# Altium PCB team dashboard display.PcbDoc
Units mil, origin at the board's own origin, x right, y up, seen from the top; angles counter-clockwise.
Board outline 3349.21 x 3087.01 mil, 2 copper layers (Top, Bottom); 36 components, 40 nets, 146 pads, 0 vias.
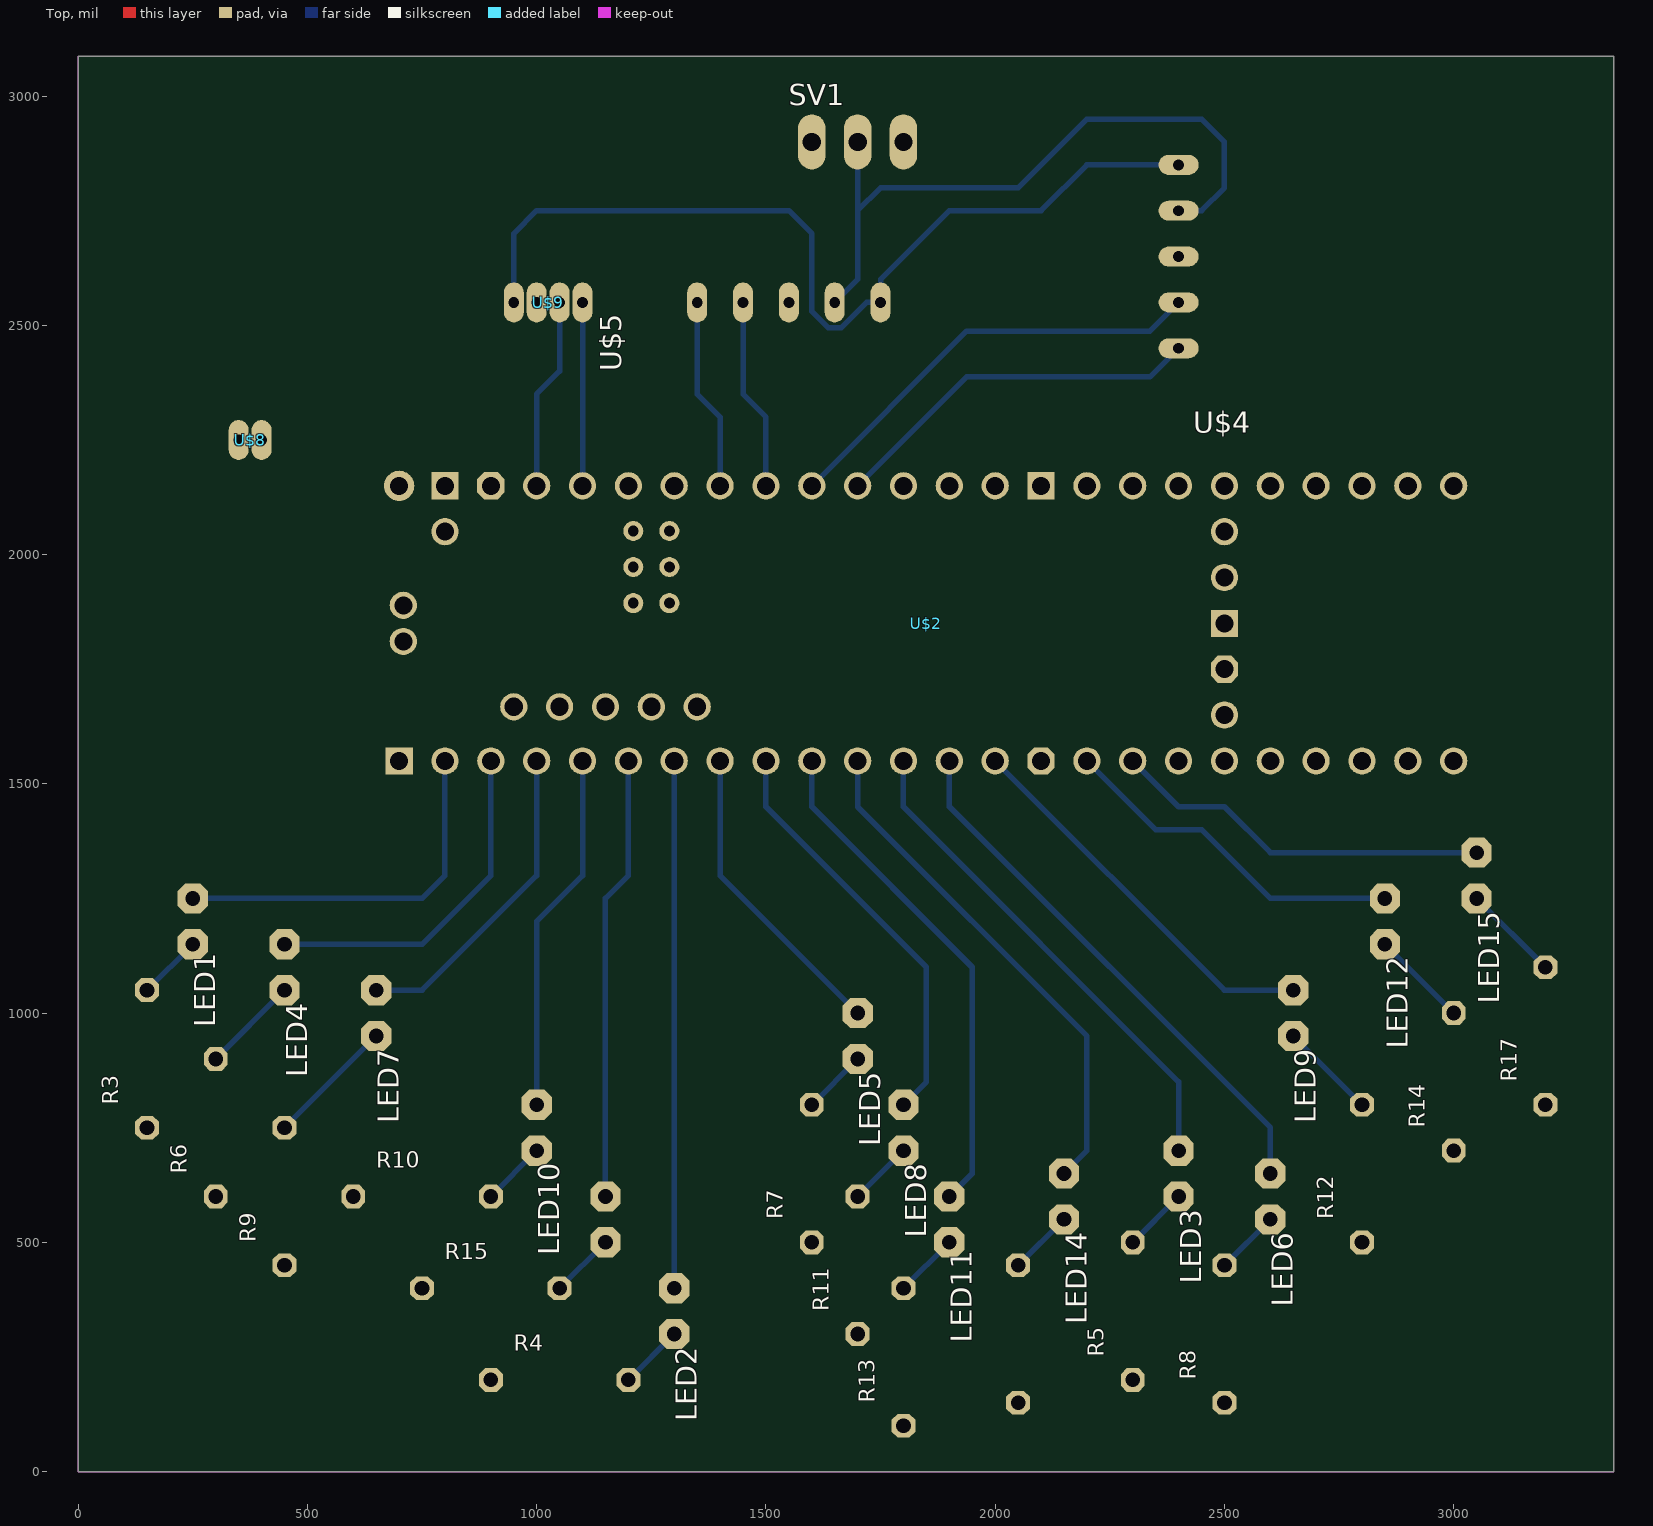
[diagram p0: Top view]
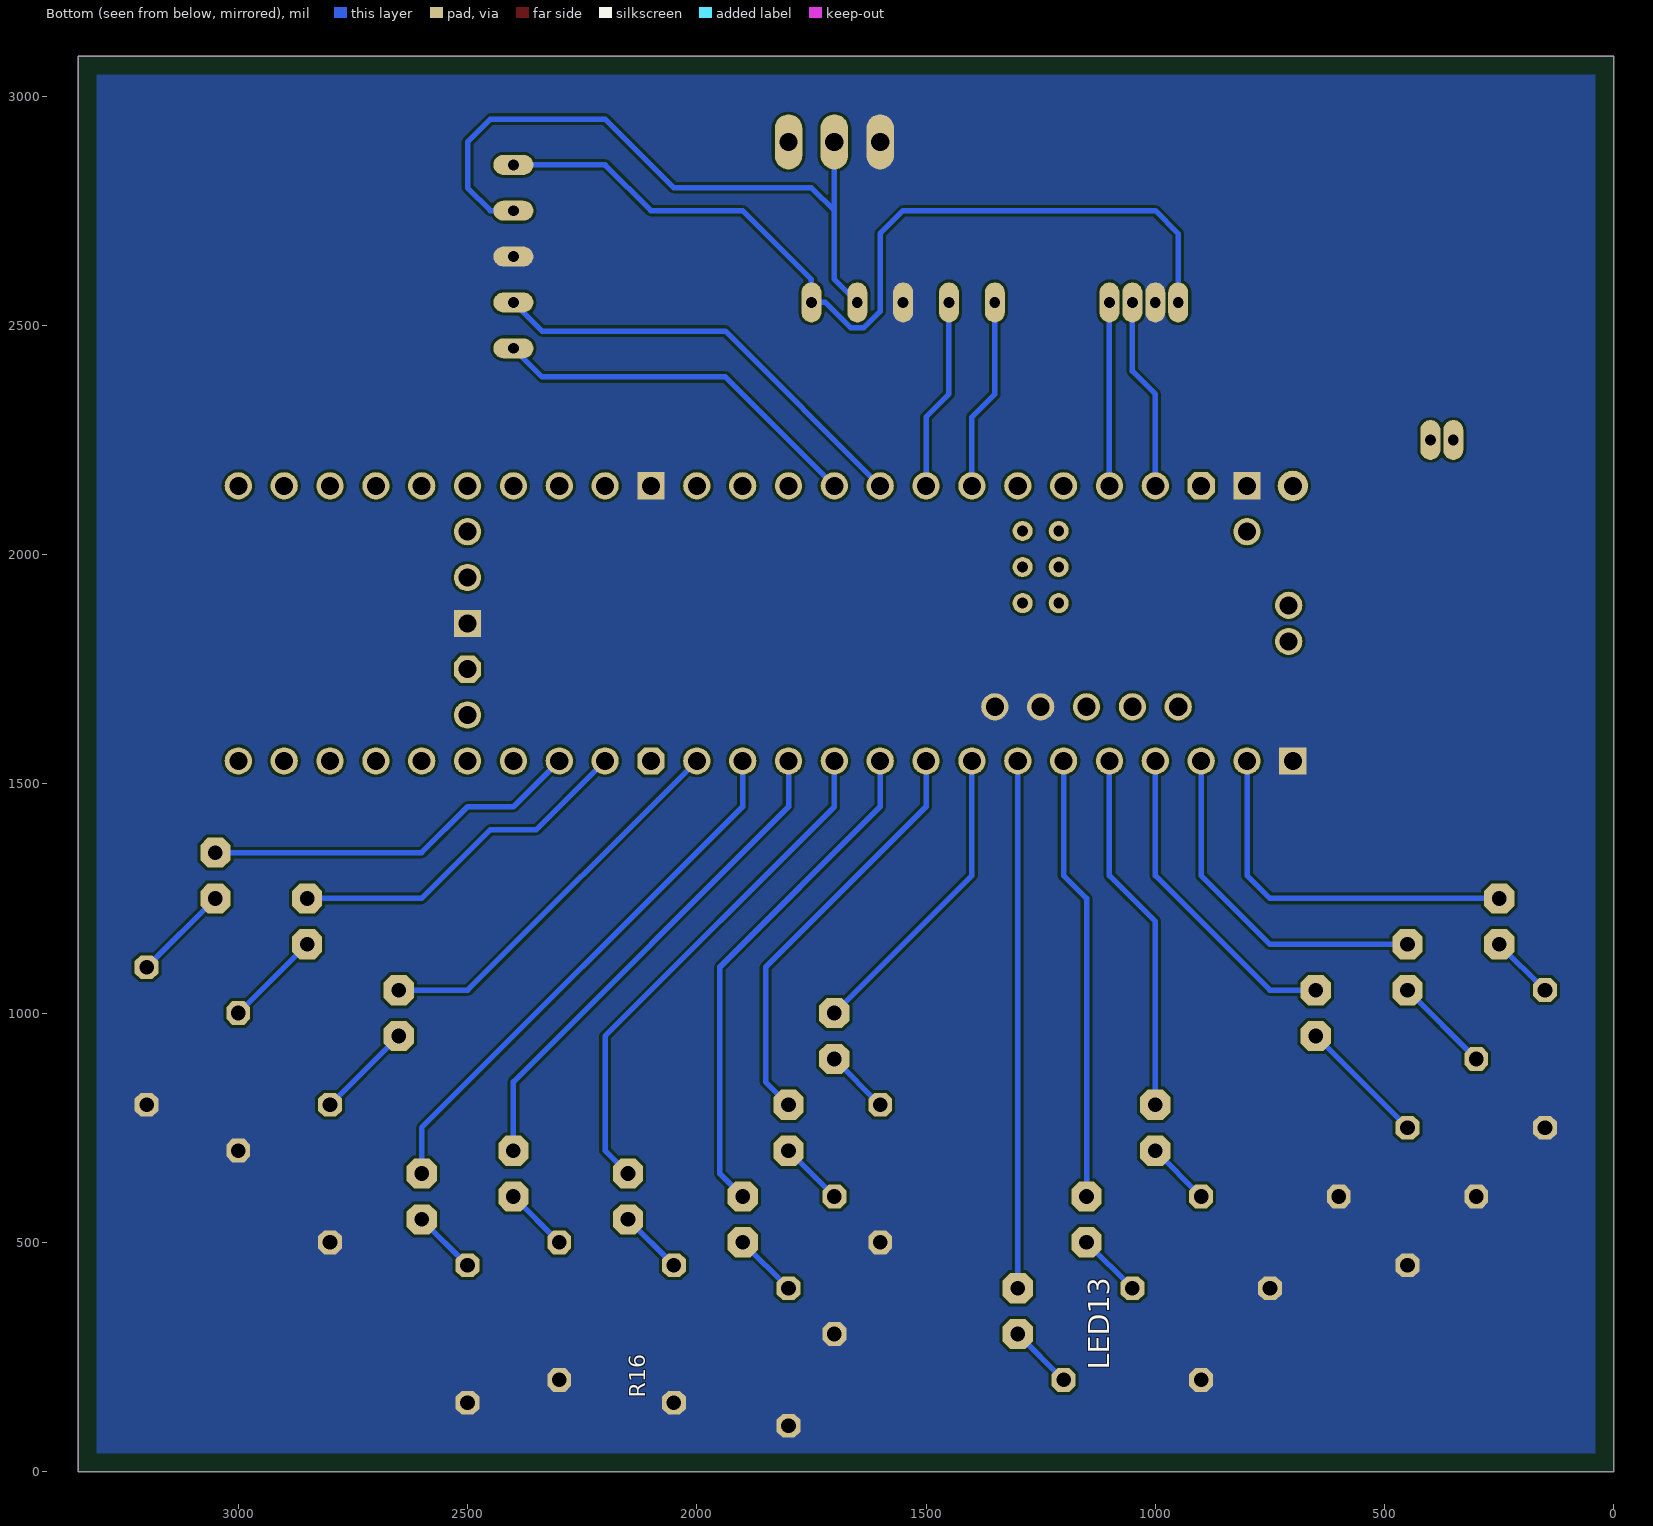
[diagram p1: Bottom view, seen from below]

## Layer stack, top to bottom
Top Solder: solder mask 0.4, Solder Resist, Dk 3.5
Top: signal copper 1.378
Dielectric 1: dielectric 12.6, FR-4, Dk 4.8
Bottom: signal copper 1.378
Bottom Solder: solder mask 0.4, Solder Resist, Dk 3.5

## Board outline
0,3087.01 0,0 3349.21,0 3349.21,3087.01

## Design rules (kind name [scope] priority, off if disabled: settings)
BoardOutlineClearance mdCopperDimension [All] p1: gap=10 ignorepadtopadclearanceinfootprint=FALSE except(0: Arc-SplitContinuation Track-SplitContinuation SMDPad-SplitContinuation THPad-SplitContinuation Via-SplitContinuation Fill-SplitContinuation Poly-SplitContinuation Region-SplitContinuation Text-SplitContinuation; 40: Poly-OutlineEdge Poly-CavityEdge Poly-CutoutEdge Poly-SplitBarrior)
Clearance "Clearance (Same Net)" [All] p1: gap=6 ignorepadtopadclearanceinfootprint=FALSE
Clearance [All] p2: gap=6 ignorepadtopadclearanceinfootprint=FALSE
HoleSize [All] p1: absolutevalues=TRUE maxlimit=100000 minlimit=13.78 maxpercent=80.000 minpercent=20.000
HoleToHoleClearance mdDrill [All] p1: gap=6 allowstackedmicrovias=TRUE
MinimumSolderMaskSliver [All] p1 off: minsoldermaskwidth=10
PasteMaskExpansion mlMinCreamFrame [All] p1: expansion=0
PolygonConnect PolygonConnect_For_PolygonThermal_ON_Width120000_Gap100000 [InPolygonClass('PolygonThermal_ON_Width120000_Gap100000') vs Not IsVia] p1: connectstyle=Relief reliefconductorwidth=12 reliefentries=4 polygonreliefangle="90 Angle" airgapwidth=10
PolygonConnect ThermalVias [IsVia] p2: connectstyle=Direct reliefconductorwidth=10 reliefentries=4 polygonreliefangle="90 Angle" airgapwidth=10
PolygonConnect [All] p3: connectstyle=Relief reliefconductorwidth=10 reliefentries=4 polygonreliefangle="90 Angle" airgapwidth=10
RoutingVias [All] p1: holewidth=13.78 width=29.78 viastyle="Through Hole" minholewidth=13.78 minwidth=29.78 maxholewidth=100 maxwidth=100
SolderMaskExpansion mlMinStopFrame [All] p1: expansion=4 istentingtop=FALSE
Width [All] p1: maxlimit=10 minlimit=6 preferedwidth=6
26 further rules are at their usual default settings.

## Classes and differential pairs
polygon class PolygonThermal_ON_Width120000_Gap100000: Polygon_1_Net_GND

## Components (designator, comment, footprint, x,y, rotation, side; value= is the part's Value field where it differs from the comment)
LED1 "" LED3MM 250,1200 r270 top
LED2 "" LED3MM 1300,350 r270 top
LED3 "" LED3MM 2400,650 r270 top
LED4 "" LED3MM 450,1100 r270 top
LED5 "" LED3MM 1700,950 r270 top
LED6 "" LED3MM 2600,600 r270 top
LED7 "" LED3MM 650,1000 r270 top
LED8 "" LED3MM 1800,750 r270 top
LED9 "" LED3MM 2650,1000 r270 top
LED10 "" LED3MM 1000,750 r270 top
LED11 "" LED3MM 1900,550 r270 top
LED12 "" LED3MM 2850,1200 r270 top
LED13 "" LED3MM 1150,550 r270 bottom
LED14 "" LED3MM 2150,600 r270 top
LED15 "" LED3MM 3050,1300 r270 top
R3 "47k" 0204/7 150,900 r90 top
R4 "47k" 0204/7 1050,200 r0 top
R5 "47k" 0204/7 2300,350 r90 top
R6 "47k" 0204/7 300,750 r90 top
R7 "47k" 0204/7 1600,650 r90 top
R8 "47k" 0204/7 2500,300 r90 top
R9 "47k" 0204/7 450,600 r90 top
R10 "47k" 0204/7 750,600 r0 top
R11 "47k" 0204/7 1700,450 r90 top
R12 "47k" 0204/7 2800,650 r90 top
R13 "47k" 0204/7 1800,250 r90 top
R14 "47k" 0204/7 3000,850 r90 top
R15 "47k" 0204/7 900,400 r0 top
R16 "47k" 0204/7 2050,300 r90 bottom
R17 "47k" 0204/7 3200,950 r90 top
SV1 "" MA03-1 1700,2900 r0 top
U$2 "" TEENSY41 1900,1850 r0 top
U$4 "" 5IL 2400,2650 r180 top
U$5 "" 5IL 1550,2550 r90 top
U$8 "" CAN_BUS 200,2150 r0 top
U$9 "" CAN_TEN 850,2500 r0 top

## Footprints (in the part's own frame and the unit in brackets; to place one, negate y for a bottom-side part, rotate by r counter-clockwise, add the part's x,y. Pads: shape width x height; smd on the part's side, far side on the other; paste and mask are expansions set on the pad)
5IL [mil] "5IL"
  oval 87.24x43.62 hole 23.62: P$1(0,-200) P$2(0,-100) P$3(0,0) P$4(0,100) P$5(0,200)
0204/7 [mil] "0204/7"
  oct 52x52 / inner round 48.04 / far side oct 52x52 hole 32: 1(-150,0) 2(150,0)
CAN_BUS [mil] "CAN_BUS"
  oval 43.62x87.24 hole 23.62: P$2(150,100) P$3(200,100)
CAN_TEN [mil] "CAN_TEN"
  oval 43.62x87.24 hole 23.62: P$1(100,50) P$2(150,50) P$3(200,50) P$4(250,50)
LED3MM [mil] "LED3MM"
  oct 66x66 / inner round 60.98 / far side oct 66x66 hole 32: A(-50,0) K(50,0)
MA03-1 [mil] "MA03-1"
  oval 60x120 hole 40: 1(-100,0) 2(0,0) 3(100,0)
TEENSY41 [mm] "TEENSY41"
  round 1.508 hole 1: 0-RX1/CS1/CRX2(-27.94,-7.62) 1-TX1/MISO1/CTX2(-25.4,-7.62) 2-OUT2(-22.86,-7.62) 3-LRCLK2(-20.32,-7.62) 4-BCLK2(-17.78,-7.62) 5-IN2(-15.24,-7.62) 6-OUT1D(-12.7,-7.62) 7-RX2/OUT1A(-10.16,-7.62) 8-TX2/IN2(-7.62,-7.62) 9-OUT1C(-5.08,-7.62) 10-CS\MQSR(-2.54,-7.62) 11-MOSI/CTX1(0,-7.62) 12-MISO/MQSL(2.54,-7.62) 13-SCK/LED(2.54,7.62) 14-A0/TX3/SPDIF_OUT(0,7.62) 15-A1/RX3/SPDIF_IN(-2.54,7.62) 16-A2/RX4/SCL1(-5.08,7.62) 17-A3/TX4/SDA1(-7.62,7.62) 18-A4/SDA0(-10.16,7.62) 19-A5/SCL0(-12.7,7.62) 20-A6/TX5/LRCLK1(-15.24,7.62) 21-A7/RX5/BCLK1(-17.78,7.62) 22-A8/CTX1(-20.32,7.62) 23-A9/CRX1/MCLK1(-22.86,7.62) 24-A10/TX6/SCL2(7.62,-7.62) 25-A11/RX6/SDA2(10.16,-7.62) 26-A12/MOSI1(12.7,-7.62) 27-A13/SCK1(15.24,-7.62) 28-RX7(17.78,-7.62) 29-TX7(20.32,-7.62) 30-CRX3(22.86,-7.62) 31-CTX3(25.4,-7.62) 32-OUT1B(27.94,-7.62) 33-MCLK2(27.94,7.62) 34-RX8(25.4,7.62) 35-TX8(22.86,7.62) 36-PWM(20.32,7.62) 37-PWM(17.78,7.62) 38-A14/CS/IN1(15.24,7.62) 39-A15/CS/OUT1A(12.7,7.62) 40-A16/CS1(10.16,7.62) 41-A17/MISO1(7.62,7.62) +5V(-24.13,-4.62) D+(-30.25,-1) D-(-30.25,1) DM(-21.59,-4.62) DP(-19.05,-4.62) GND4(-16.51,-4.62) GND5(-13.97,-4.62) ON/OFF(15.24,5.08) PROGRAM(15.24,2.54) VBAT(15.24,-5.08) VUSB(-27.94,5.08)
  oct 1.508x1.508 / inner round 1.393 / far side oct 1.508x1.508 hole 1: 3V3-1(5.08,-7.62) 3V3-2(15.24,-2.54) 3V3-3(-25.4,7.62)
  round 1.108 hole 0.6: G(-15.51,3.12) LED(-17.51,3.12) R+(-17.51,5.12) R-(-15.51,5.12) T+(-15.51,1.12) T-(-17.51,1.12)
  rect 1.508x1.508 / inner round 1.393 / far side rect 1.508x1.508 hole 1: GND1(-30.48,-7.62) GND2(15.24,0) GND3(5.08,7.62) GND6(-27.94,7.62)
  round 1.676 hole 1: VIN(-30.48,7.62)

## Part data
LED1 LED2 LED3 LED4 LED5 LED6 LED7 LED8 LED9 LED10 LED11 LED12 LED13 LED14 LED15: library part LED3MM, PackageName=LED3MM
R3 R4 R5 R6 R7 R8 R9 R10 R11 R12 R13 R14 R15 R16 R17: library part 0204/7, PackageName=0204/7
SV1: library part MA03-1, PackageName=MA03-1
U$2: library part TEENSY41, PackageName=TEENSY41
U$4 U$5: library part 5IL, PackageName=5IL
U$8: library part CAN_BUS, PackageName=CAN_BUS
U$9: library part CAN_TEN, PackageName=CAN_TEN

## Nets (pads, with @x,y where several pads share a name; then routed paths per layer and width w, separated by ;. In a path a pad name is that pad's centre, name@x,y a point inside that pad or via, vN(x,y) a via of type N, cw(c..) or ccw(c..) an arc to the next point about the centre after c; other vN are vias at no path point)
3.3V: U$4.P$1 U$5.P$1 U$9.P$1 | length 2002.6
  Bottom w12: U$9.P$1 950,2700 1000,2750 1550,2750 1600,2700 1600,2530.37 1635.99,2494.38 1664.01,2494.38 1719.63,2550 U$5.P$1 1750,2600 1900,2750 2100,2750 2200,2850 U$4.P$1
5V: SV1.2 U$4.P$2 U$5.P$2 | length 1495
  Bottom w12: U$5.P$2 1700,2600 1700,2750 ; SV1.2 1700,2750 ; U$4.P$2 2450,2750 2500,2800 2500,2900 2450,2950 2200,2950 2050,2800 1750,2800 1700,2750
12V: SV1.3
A1-L1: LED1.A U$2.0-RX1/CS1/CRX2 | length 820.7
  Bottom w12: LED1.A 750,1250 800,1300 U$2.0-RX1/CS1/CRX2
A1-L2: LED4.A U$2.1-TX1/MISO1/CTX2 | length 762.1
  Bottom w12: LED4.A 750,1150 900,1300 U$2.1-TX1/MISO1/CTX2
A1-L3: LED7.A U$2.2-OUT2 | length 703.6
  Bottom w12: LED7.A 750,1050 1000,1300 U$2.2-OUT2
A1-L4: LED10.A U$2.3-LRCLK2 | length 791.4
  Bottom w12: LED10.A 1000,1200 1100,1300 U$2.3-LRCLK2
A1-L5: LED13.A U$2.4-BCLK2 | length 970.7
  Bottom w12: LED13.A 1150,1250 1200,1300 U$2.4-BCLK2
A2-L1: LED2.A U$2.5-IN2 | length 1150
  Bottom w12: LED2.A U$2.5-IN2
A2-L2: LED5.A U$2.6-OUT1D | length 674.3
  Bottom w12: U$2.6-OUT1D 1400,1300 LED5.A
A2-L3: LED8.A U$2.7-RX2/OUT1A | length 915.7
  Bottom w12: U$2.7-RX2/OUT1A 1500,1450 1850,1100 1850,850 LED8.A
A2-L4: LED11.A U$2.8-TX2/IN2 | length 1115.7
  Bottom w12: U$2.8-TX2/IN2 1600,1450 1950,1100 1950,650 LED11.A
A2-L5: LED14.A U$2.9-OUT1C | length 1127.8
  Bottom w12: U$2.9-OUT1C 1700,1450 2200,950 2200,700 LED14.A
A3-L1: LED3.A U$2.10-CS\MQSR | length 1098.5
  Bottom w12: U$2.10-CS\MQSR 1800,1450 2400,850 LED3.A
A3-L2: LED6.A U$2.11-MOSI/CTX1 | length 1189.9
  Bottom w12: U$2.11-MOSI/CTX1 1900,1450 2600,750 LED6.A
A3-L3: LED9.A U$2.12-MISO/MQSL | length 857.1
  Bottom w12: U$2.12-MISO/MQSL 2500,1050 LED9.A
A3-L4: LED12.A U$2.24-A10/TX6/SCL2 | length 774.3
  Bottom w12: U$2.24-A10/TX6/SCL2 2350,1400 2450,1400 2600,1250 LED12.A
A3-L5: LED15.A U$2.25-A11/RX6/SDA2 | length 832.8
  Bottom w12: U$2.25-A11/RX6/SDA2 2400,1450 2500,1450 2600,1350 LED15.A
GND: R3.1 R4.1 R5.1 R6.1 R7.1 R8.1 R9.1 R10.1 R11.1 R12.1 R13.1 R14.1 R15.1 R16.1 R17.1 SV1.1 U$2.GND1 U$2.GND2 U$2.GND3 U$2.GND4 U$2.GND5 U$2.GND6 U$4.P$3 U$5.P$3 U$9.P$2
N$6: U$2.17-A3/TX4/SDA1 U$4.P$4 | length 965.7
  Bottom w12: U$2.17-A3/TX4/SDA1 1937.5,2487.5 2337.5,2487.5 U$4.P$4
N$7: U$2.16-A2/RX4/SCL1 U$4.P$5 | length 824.3
  Bottom w12: U$2.16-A2/RX4/SCL1 1937.5,2387.5 2337.5,2387.5 U$4.P$5
N$8: U$2.18-A4/SDA0 U$5.P$4 | length 420.7
  Bottom w12: U$5.P$4 1450,2350 1500,2300 U$2.18-A4/SDA0
N$9: U$2.19-A5/SCL0 U$5.P$5 | length 420.7
  Bottom w12: U$5.P$5 1350,2350 1400,2300 U$2.19-A5/SCL0
N$10: LED1.K R3.2 | length 141.4
  Bottom w12: R3.2 LED1.K
N$11: LED2.K R4.2 | length 141.4
  Bottom w12: R4.2 LED2.K
N$12: U$2.22-A8/CTX1 U$9.P$4 | length 400
  Bottom w12: U$2.22-A8/CTX1 U$9.P$4
N$13: U$2.23-A9/CRX1/MCLK1 U$9.P$3 | length 420.7
  Bottom w12: U$2.23-A9/CRX1/MCLK1 1000,2350 1050,2400 U$9.P$3
N$14: LED3.K R5.2 | length 141.4
  Bottom w12: R5.2 LED3.K
N$15: LED4.K R6.2 | length 212.1
  Bottom w12: R6.2 LED4.K
N$16: LED5.K R7.2 | length 141.4
  Bottom w12: R7.2 LED5.K
N$17: LED6.K R8.2 | length 141.4
  Bottom w12: R8.2 LED6.K
N$18: LED7.K R9.2 | length 282.8
  Bottom w12: R9.2 LED7.K
N$19: LED10.K R10.2 | length 141.4
  Bottom w12: R10.2 LED10.K
N$20: LED8.K R11.2 | length 141.4
  Bottom w12: R11.2 LED8.K
N$21: LED9.K R12.2 | length 212.1
  Bottom w12: LED9.K R12.2
N$22: LED11.K R13.2 | length 141.4
  Bottom w12: R13.2 LED11.K
N$23: LED12.K R14.2 | length 212.1
  Bottom w12: LED12.K R14.2
N$24: LED13.K R15.2 | length 141.4
  Bottom w12: R15.2 LED13.K
N$25: LED14.K R16.2 | length 141.4
  Bottom w12: R16.2 LED14.K
N$26: LED15.K R17.2 | length 212.1
  Bottom w12: LED15.K R17.2
pads on no net: U$2.3V3-1 U$2.3V3-2 U$2.3V3-3 U$2.13-SCK/LED U$2.14-A0/TX3/SPDIF_OUT U$2.15-A1/RX3/SPDIF_IN U$2.20-A6/TX5/LRCLK1 U$2.21-A7/RX5/BCLK1 U$2.26-A12/MOSI1 U$2.27-A13/SCK1 U$2.28-RX7 U$2.29-TX7 U$2.30-CRX3 U$2.31-CTX3 U$2.32-OUT1B U$2.33-MCLK2 U$2.34-RX8 U$2.35-TX8 U$2.36-PWM U$2.37-PWM U$2.38-A14/CS/IN1 U$2.39-A15/CS/OUT1A U$2.40-A16/CS1 U$2.41-A17/MISO1 U$2.+5V U$2.D+ U$2.D- U$2.DM U$2.DP U$2.G U$2.LED U$2.ON/OFF U$2.PROGRAM U$2.R+ U$2.R- U$2.T+ U$2.T- U$2.VBAT U$2.VIN U$2.VUSB U$8.P$2 U$8.P$3

## Polygon pours and split planes (outlines as drawn)
GND on Bottom "Polygon_1_Net_GND" (solid, remove dead copper, pour order 0): -6,-6 3356,-6 3356,3106 -6,3106

## Keep-outs
Keep-Out Layer:
  the board outline again, w0

## Silkscreen, mask and mechanical layers (free items; w line width, h text height)
Dimension:
  the board outline again, w0

## Text inside footprints (layer, text, board x,y; h text height)
SV1: tPlace "1" at 1500,2875 h77.5
U$2: tPlace "POGO" at 770.78,1803.76 h37.2 r90; tPlace "COIN CEL" at 2310,1633 h37.2; tPlace "3 VOLT" at 2345,1660 h37.2; tPlace "USB" at 809.89,1805.74 h49.6 r90; tPlace "TEENSY 4.1" at 1600,1850 h77.5